# Altium PCB 24.064.PcbDoc
Units mil, origin at the board's own origin, x right, y up, seen from the top; angles counter-clockwise.
Board outline 1417.32 x 866.14 mil, 2 copper layers (Top Layer, Bottom Layer); 3 components, 16 nets, 33 pads, 0 vias.
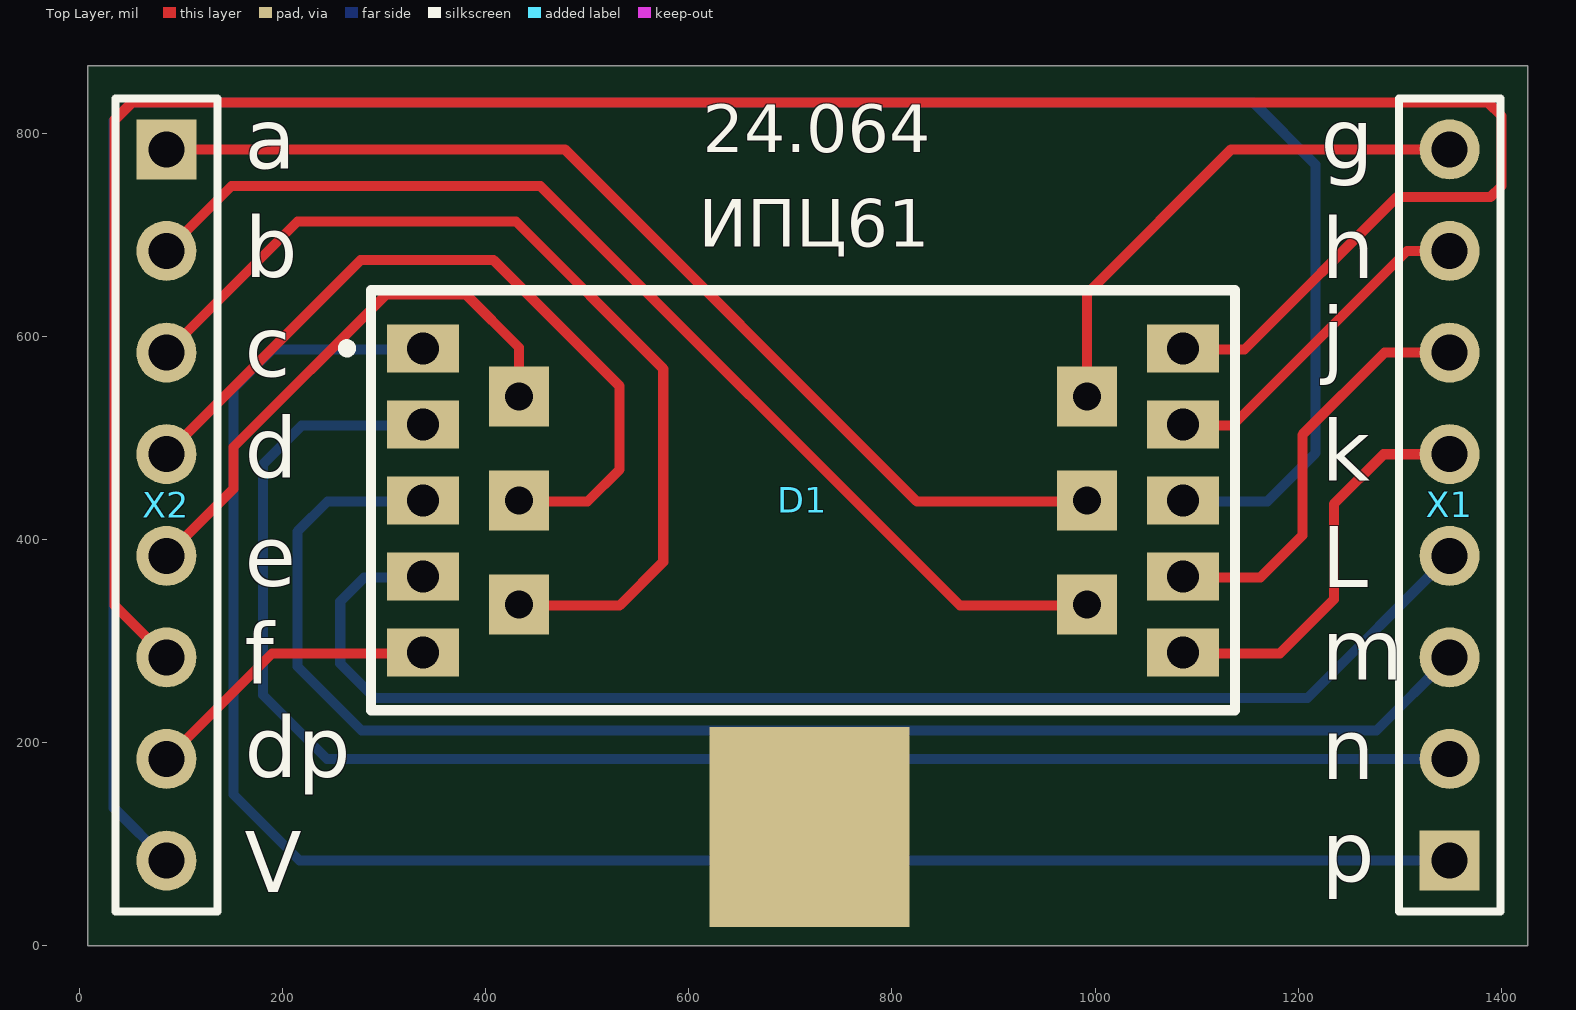
[diagram p0: Top Layer view]
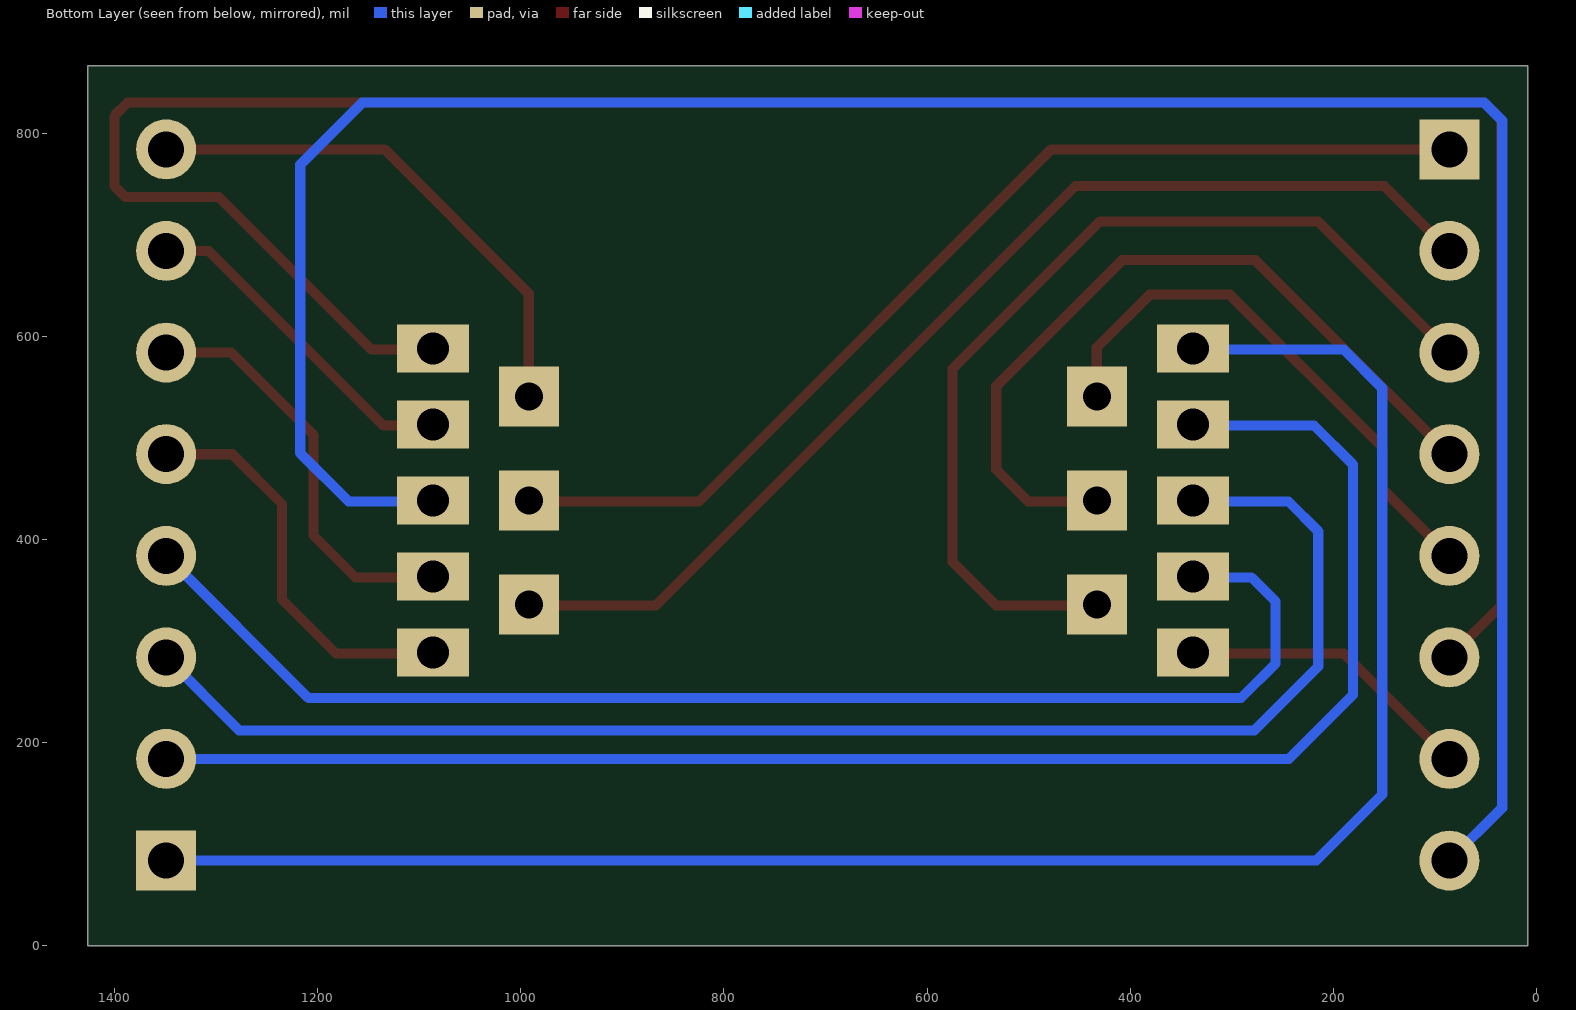
[diagram p1: Bottom Layer view, seen from below]

## Layer stack, top to bottom
Top Solder: solder mask 0.4, Solder Resist, Dk 3.5
Top Layer: signal copper 1.4
Dielectric 1: dielectric 12.6, FR-4, Dk 4.8
Bottom Layer: signal copper 1.4
Bottom Solder: solder mask 0.4, Solder Resist, Dk 3.5

## Board outline
1426,0 8.68,0 8.68,866.14 1426,866.14

## Design rules (kind name [scope] priority, off if disabled: settings)
Clearance [All] p1: gap=10 ignorepadtopadclearanceinfootprint=FALSE except(0: Arc-Hole Track-Hole SMDPad-Hole THPad-Hole Via-Hole Fill-Hole Poly-Hole Region-Hole Text-Hole)
PolygonConnect [All] p1: connectstyle=Relief reliefconductorwidth=10 reliefentries=4 polygonreliefangle="90 Angle" airgapwidth=10
RoutingVias [All] p1: holewidth=28 width=50 viastyle="Through Hole" minholewidth=28 minwidth=50 maxholewidth=28 maxwidth=50
SolderMaskExpansion [All] p1: expansion=4
Width [All] p1: maxlimit=10 minlimit=10 preferedwidth=10
30 further rules are at their usual default settings.

## Components (designator, comment, footprint, x,y, rotation, side; value= is the part's Value field where it differs from the comment)
D1 "Indicator 14" "INDICATIR 14" 338.46,588.24 r270 top
X1 "Header 8" HDR1X8 1349,84 r90 top
X2 "Header 8" HDR1X8 86,784 r270 top

## Footprints (in the part's own frame and the unit in brackets; to place one, negate y for a bottom-side part, rotate by r counter-clockwise, add the part's x,y. Pads: shape width x height; smd on the part's side, far side on the other; paste and mask are expansions set on the pad)
HDR1X8 [mm] "Connector; Header; 8 Position"
  rect 1.5x1.5 hole 0.9: 1(0,0)
  round 1.5 hole 0.9: 2(2.54,0) 3(5.08,0) 4(7.62,0) 5(10.16,0) 6(12.7,0) 7(15.24,0) 8(17.78,0)
  silkscreen extent -1.27,-1.27 19.05,1.27
"INDICATIR 14" [mm] "24.064"
  rect 1.2x1.8 hole 0.8: 1(0,0) 2(1.9,0) 3(3.8,0) 4(5.7,0) 5(7.6,0) 12(7.6,19) 13(5.7,19) 14(3.8,19) 15(1.9,19) 16(0,19)
  rect 1.5x1.5 hole 0.7: 6(6.4,2.4) 7(3.8,2.4) 8(1.2,2.4) 9(1.2,16.6) 10(3.8,16.6) 11(6.4,16.6)
  silkscreen extent -1.45,-2 9.05,20.3

## Part data
X1 X2: "Header, 8-Pin", LatestRevisionDate=17-Jul-2002, LatestRevisionNote="Re-released for DXP Platform.", Publisher="Altium Limited"

## Free pads (board coordinates)
  rect 196.85x196.85 smd: 0(719,117)

## Nets (pads, with @x,y where several pads share a name; then routed paths per layer and width w, separated by ;. In a path a pad name is that pad's centre, name@x,y a point inside that pad or via, vN(x,y) a via of type N, cw(c..) or ccw(c..) an arc to the next point about the centre after c; other vN are vias at no path point)
a: D1.10 X2.1 | length 1049.6
  Top Layer w10: X2.1 478,784 824.6,437.4 D1.10@992.06,437.4
b: D1.11 X2.2 | length 1103.6
  Top Layer w10: X2.2 150,748 454,748 866.96,335.04 D1.11@992.06,335.04
c: D1.6 X2.3 | length 952.3
  Top Layer w10: X2.3 215,713 430,713 575,568 575,378 532.04,335.04 D1.6@433,335.04
d: D1.7 X2.4 | length 770.6
  Top Layer w10: X2.4 277,675 408,675 532,551 532,469 500.4,437.4 D1.7@433,437.4
dp: D1.5 X2.7 | length 295.5
  Top Layer w10: X2.7 189.8,287.8 D1.5@338.51,287.8
e: D1.8 X2.5 | length 548.2
  Top Layer w10: X2.5 152,450 152,491 302,641 381,641 433,589 D1.8@433,539.76
f: D1.16 X2.6 | length 2376.9
  Top Layer w10: X2.6 35,335 35,813.27 51.73,830 1387,830 1400,817 1400,748 1389,737 1297,737 1147.01,587.01 D1.16@1086.54,587.01
g: D1.9 X1.8 | length 518
  Top Layer w10: D1.9@992.06,539.76 992.06,642.06 1134,784 X1.8
h: D1.15 X1.7 | length 333.6
  Top Layer w10: D1.15@1086.54,512.2 1135.2,512.2 1307,684 X1.7
j: D1.13 X1.6 | length 412.2
  Top Layer w10: D1.13@1086.54,362.6 1162.6,362.6 1204,404 1204,503 1285,584 X1.6
k: D1.12 X1.5 | length 398.8
  Top Layer w10: D1.12@1086.54,287.8 1181.8,287.8 1235,341 1235,435 1284,484 X1.5
l: D1.4 X1.4 | length 1316.4
  Bottom Layer w10: D1.4@338.51,362.6 280.6,362.6 257,339 257,278 291,244 1209,244 X1.4
m: D1.3 X1.3 | length 1458.6
  Bottom Layer w10: D1.3@338.51,437.4 244.4,437.4 215,408 215,275 278,212 1277,212 X1.3
n: D1.2 X1.2 | length 1594.4
  Bottom Layer w10: D1.2@338.51,512.2 219.2,512.2 181,474 181,247 244,184 X1.2
p: D1.1 X1.1 | length 1826.2
  Bottom Layer w10: D1.1@338.51,587.01 190.01,587.01 152,549 152,149 217,84 X1.1
VCC: D1.14 X2.8 | length 2399.6
  Bottom Layer w10: X2.8 34,136 34,812.27 51.73,830 1156,830 1217,769 1217,485 1169.4,437.4 D1.14@1086.54,437.4

## Silkscreen, mask and mechanical layers (free items; w line width, h text height)
Top Overlay:
  text "24.064" at 614,766 h80
  text "a" at 163,765 h60
  text "g" at 1222,765 h60
  text "ИПЦ61" at 610,673 h80
  text "b" at 163,658 h60
  text "h" at 1223,657 h60
  text "j" at 1223,569 h60
  text "c" at 163,560 h60
  text "d" at 163,461 h60
  text "k" at 1223,458 h60
  text "e" at 163,354 h60
  text "L" at 1223,353 h60
  text "m" at 1223,262 h60
  text "f" at 163,258 h60
  text "dp" at 163,166 h60
  text "n" at 1223,164 h60
  text "p" at 1223,63 h60
  text "V" at 163,53 h60
Mechanical 1:
  the board outline again, w10